# Allegro board CAD1.brd
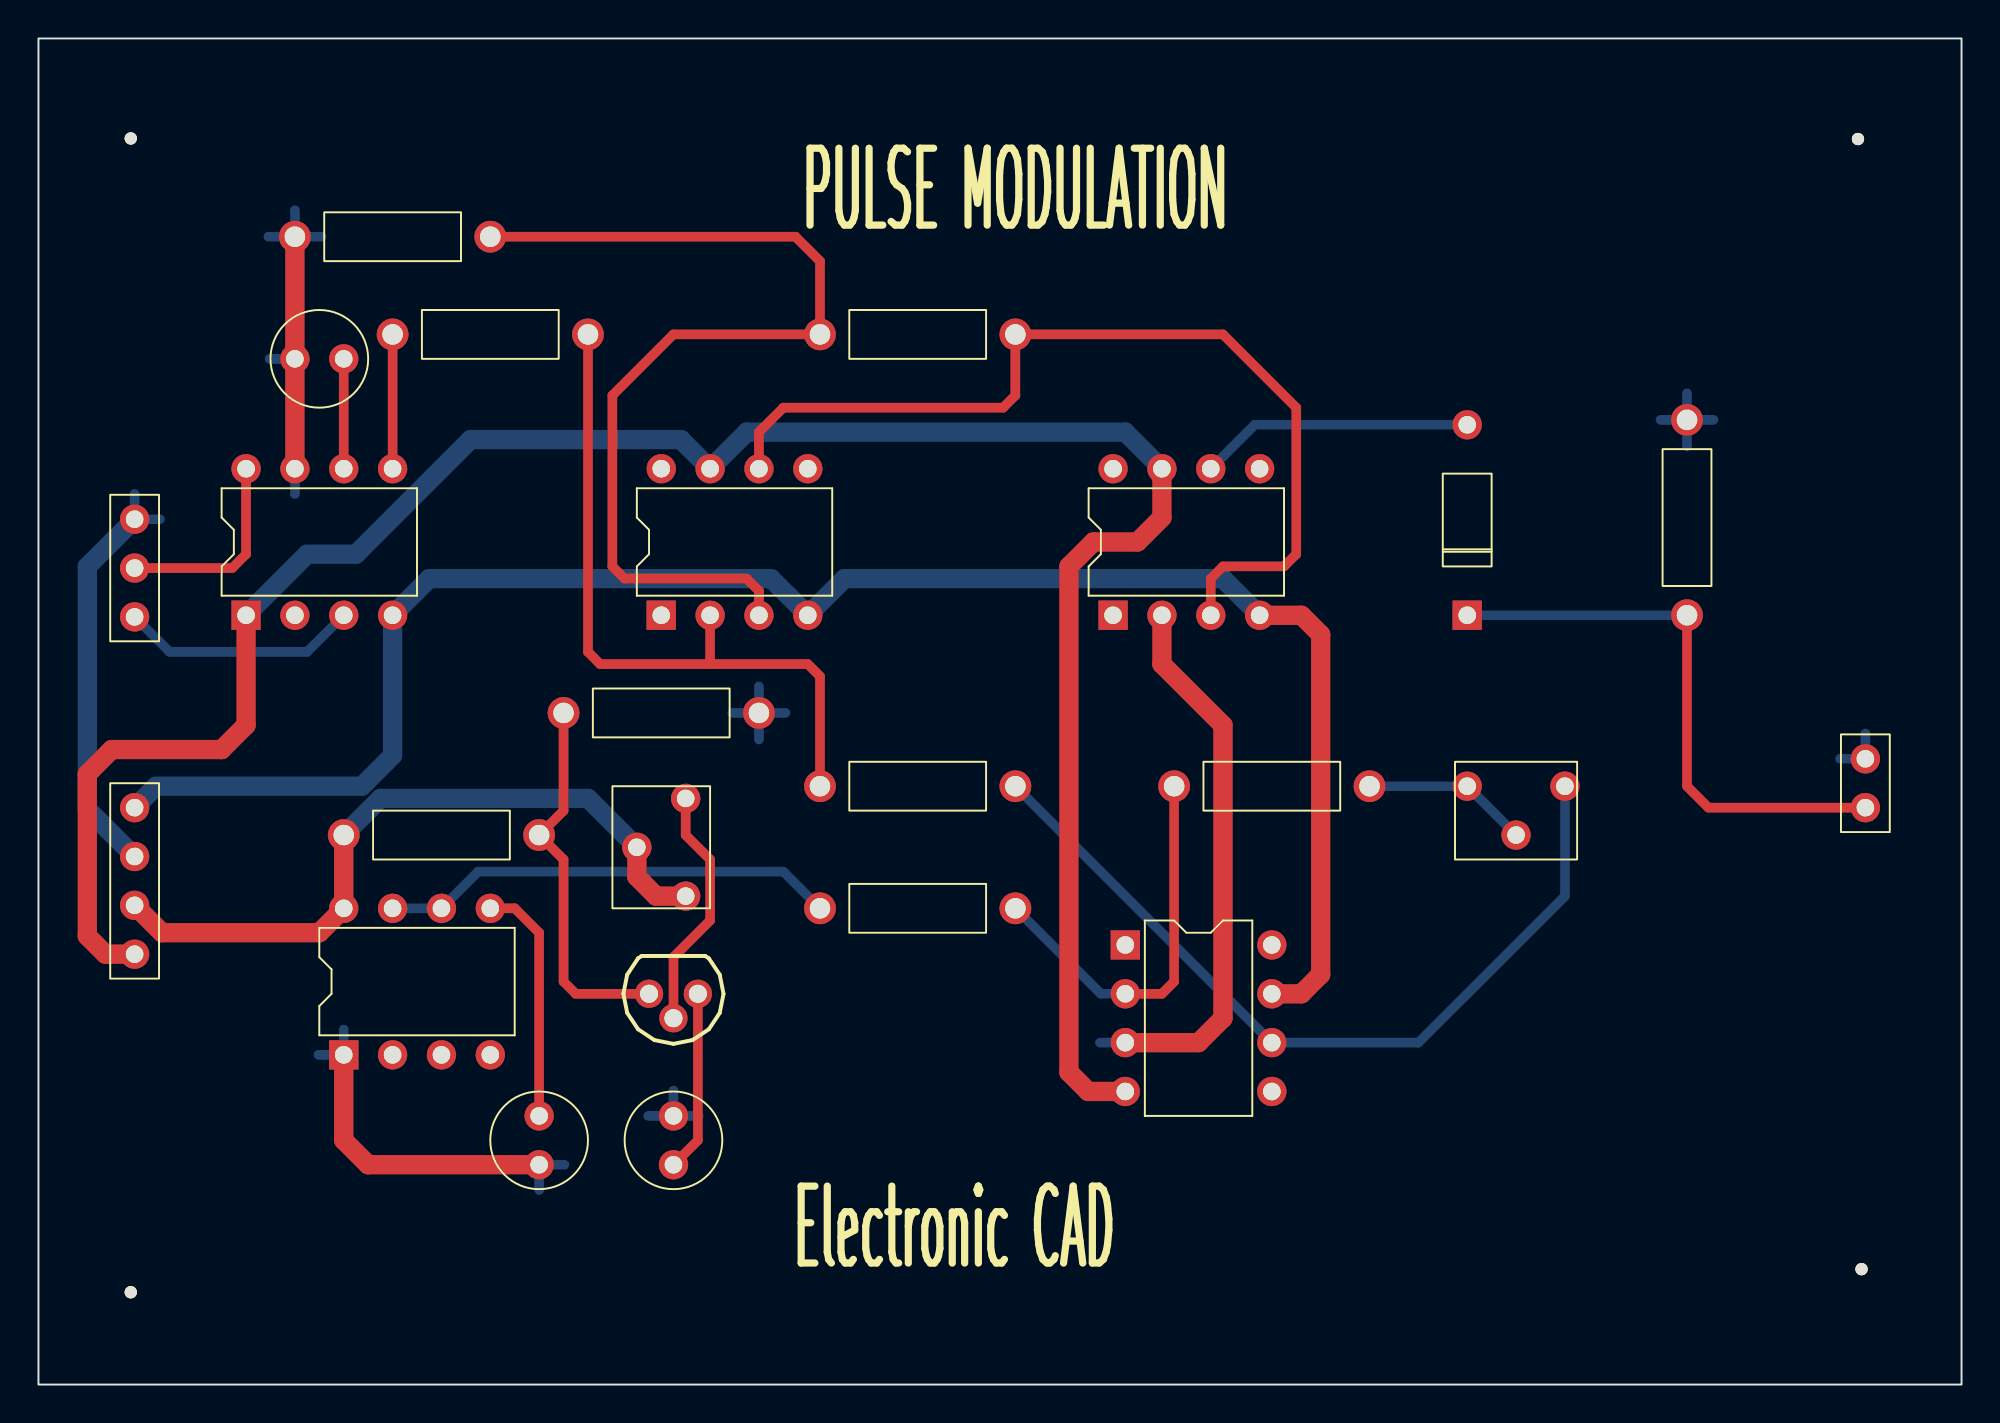
[diagram p0: board, top side]
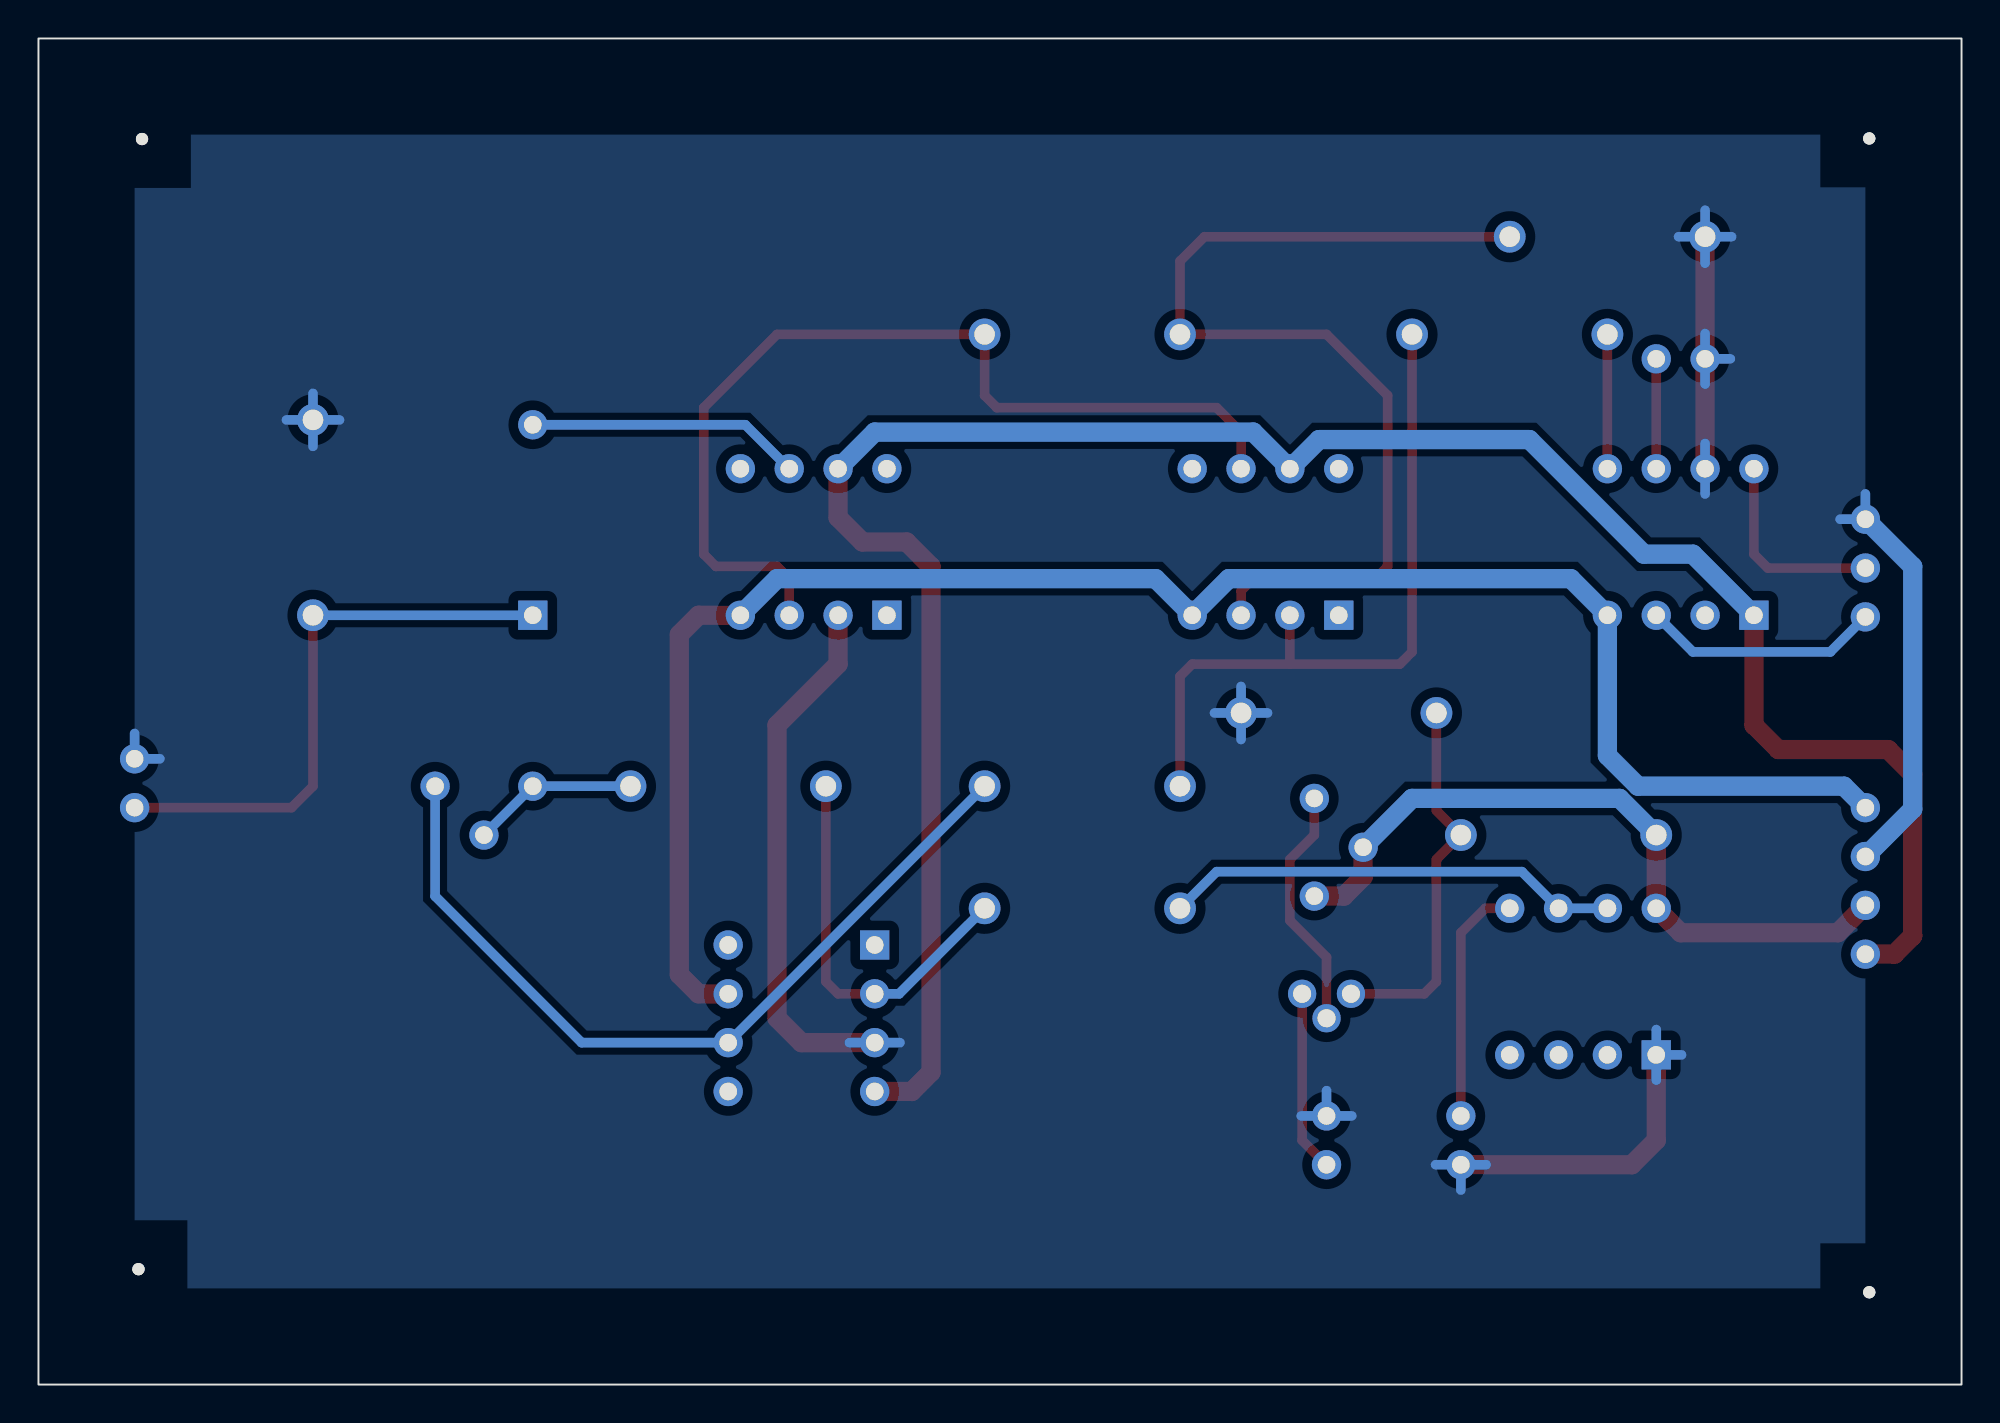
[diagram p1: board, bottom side, seen from below]

Outline 100 x 70 mm; copper layers: TOP, BOTTOM. Coordinates in mm from the lower left corner of the outline.
Outline path: rectangle 0,0 100,70

## Design rules (mm)
constraint set DEFAULT: min track width 0.5

## Placement (name value [footprint] x y rotation side)
C1  0.01uF  [CAP196]  33.02 11.43 0 top
C2  0.01uF  [CAP196]  26.04 13.97 180 top
C3  0.01uF  [CAP196]  13.34 53.34 270 top
D2  DIODE  [DO41]  74.3 40.01 0 top
J1  CON4  [JUMPER4]  5 30 270 top
J2  CON3  [JUMPER3]  5 45 270 top
J3  CON2  [JUMPER2]  95 30 90 top
NOREF  -  []  0 70 0 top
NOREF#2  -  [unnamed#2]  94.8 6 0 top
NOREF#3  -  [unnamed#2]  4.8 4.8 0 top
NOREF#4  -  [unnamed#2]  4.8 64.8 0 top
NOREF#5  -  [unnamed#2]  94.61 64.77 0 top
NOREF#6  -  []  100 0 90 top
Q1  2SA1020  [TO226AB]  34.29 20.32 180 top
R1  560  [RES400]  59.05 31.11 270 top
R2  39K  [RES400]  15.88 28.57 270 top
R3  6.2K  [RES400]  40.64 24.77 270 top
R4  100K  [RES400]  27.3 34.92 270 top
R5  10K  [RES400]  50.8 31.11 90 top
R6  10K  [RES400]  50.8 54.61 90 top
R7  10K  [RES400]  18.41 54.61 270 top
R8  10K  [RES400]  13.34 59.69 270 top
R9  10K  [RES400]  85.72 40.01 0 top
U1  NE555  [DIP8_3]  15.88 17.14 90 top
U2  LF356  [DIP8_3]  56.52 22.86 0 top
U3  LF398  [DIP8_3]  10.79 40.01 90 top
U4  LF356  [DIP8_3]  32.38 40.01 90 top
U5  LF356  [DIP8_3]  55.88 40.01 90 top
VR1  5K  [RESADJ]  33.66 30.48 0 top
VR2  20K  [RESADJ]  74.3 31.11 90 top

## Library data of the parts
C1-C3 = CAP NP: Tolerance: ***; User Part Number: ***
D2 = DIODE
J1 = CON4: User Part Number: ***
J2 = CON3: User Part Number: ***
J3 = CON2: User Part Number: ***
Q1 = 2SA1020
R1-R9 = R: Tolerance: ***; User Part Number: ***
U1 = NE555_0: Tolerance: ***; User Part Number: ***
U2 U4 U5 = LF356_7: Tolerance: ***; User Part Number: ***
U3 = LF357_2: Tolerance: ***; User Part Number: ***
VR1 VR2 = POT: Tolerance: ***; User Part Number: ***

## Footprints (pads in the part's own frame, mm; a bottom-side part is the same pattern mirrored in y, then rotated)
CAP196
  round 1.524 hole 0.914: 1(0,0) 2(0,2.54)
DIP8_3
  rect 1.524x1.524 hole 0.914: 1(0,0)
  round 1.524 hole 0.914: 2(0,-2.54) 3(0,-5.08) 4(0,-7.62) 5(7.62,-7.62) 6(7.62,-5.08) 7(7.62,-2.54) 8(7.62,0)
DO41
  rect 1.524x1.524 hole 0.914: 1(0,0)
  round 1.524 hole 0.914: 2(0,9.906)
JUMPER2
  round 1.524 hole 0.914: 1(0,0) 2(2.54,0)
JUMPER3
  round 1.524 hole 0.914: 1(0,0) 2(2.54,0) 3(5.08,0)
JUMPER4
  round 1.524 hole 0.914: 1(0,0) 2(2.54,0) 3(5.08,0) 4(7.62,0)
RES400
  round 1.651 hole 1.067: 1(0,0) 2(0,10.16)
RESADJ
  round 1.524 hole 0.914: 1(0,0) 2(-2.54,-2.54) 3(0,-5.08)
TO226AB
  round 1.473 hole 0.94: 1(0,0) 2(1.27,1.27) 3(2.54,0)
unnamed#2
  round 0.635 hole 3.175 unplated: (0,0)

## Nets
+5V: J1.3 R2.1 U1.8(VCC) VR1.2(WIPER) VR1.3
+15V: J1.4 U2.4 U3.1 U4.7(V-) U5.7(V-)
-15V: J1.1 U2.7(V-) U3.4(V-) U4.4 U5.4
GND: C1.2 C2.2 C3.1 J1.2 J2.1 J3.2 R4.2 R8.1 R9.2 U1.1 U2.3 U3.7 U5.2
CLOCK: U1.2
SIG_1: R5.1 U2.6 VR2.3
N00908: Q1.3 R2.2 R4.1
N00948: R3.1 U1.6 U1.7
N01029: Q1.2 VR1.1
N01231: C1.1 Q1.1(E)
N01335: R1.1 R3.2 U2.2
N01504: R1.2 VR2.1 VR2.2(WIPER)
N02320: C3.2 U3.6
N02366: J2.2 U3.8
N02370: J2.3 U3.3
N02402: R7.1 U3.5
N02445: R5.2 R7.2 U4.2
N02725: R6.2 R8.2 U4.3
N03532: R6.1 U4.6 U5.3
N04025: D2.1(K) J3.1 R9.1
N06024: C2.1 U1.5
N06727: D2.2 U5.6

Pads without a net: U1 3 4; U2 1 5 8; U3 2; U4 1 5 8; U5 1 5 8

## Routing (per net, layer and track width the routed paths; a pad name or vN(x,y) marks a point on that pad's centre or on a via; arc(x,y) is an arc through that point)
+5V: length 37.4
  TOP w1: R2.1 U1.8 14.61,23.5 6.42,23.5 J1.3 ; VR1.3 32.12,25.4 31.11,26.4 VR1.2
  BOTTOM w1: R2.1 17.78,30.48 28.57,30.48 VR1.2
+15V: length 118
  TOP w1: U5.7 58.42,45.09 57.15,43.81 54.86,43.81 53.59,42.55 53.59,16.24 54.59,15.24 U2.4 ; U3.1 10.79,34.29 9.53,33.02 3.81,33.02 2.54,31.75 2.54,23.32 3.48,22.38 J1.4
  BOTTOM w1: U5.7 56.52,49.53 36.83,49.53 U4.7 33.41,49.14 22.47,49.14 16.51,43.18 13.97,43.18 U3.1
-15V: length 94.3
  TOP w1: U5.4 65.67,40.01 66.67,39 66.67,21.32 65.67,20.32 U2.7
  BOTTOM w1: J1.1 6.12,31.11 16.82,31.11 18.41,32.71 U3.4 20.32,41.91 38.1,41.91 U4.4 41.91,41.91 61.59,41.91 U5.4
GND: length 117.5
  TOP w1: U2.3 60.33,17.78 61.59,19.05 61.59,34.29 58.42,37.47 U5.2 ; U3.7 C3.1 R8.1 ; C2.2 17.15,11.43 15.88,12.7 U1.1
  BOTTOM w0.5: 84.35,50.16 85.72,50.16 ; 85.72,50.16 87.1,50.16 ; 85.72,50.16 85.72,48.79 ; 85.72,50.16 85.72,51.54 ; 12.02,53.34 C3.1 ; C3.1 13.34,52.02 ; C3.1 13.34,54.66 ; 36.09,34.92 R4.2 ; R4.2 37.47,36.3 ; R4.2 37.47,33.55 ; R4.2 38.84,34.92 ; 11.96,59.69 R8.1 ; R8.1 13.34,58.31 ; R8.1 14.71,59.69 ; R8.1 13.34,61.07 ; U1.1 15.88,18.46 ; U1.1 15.88,15.83 ; U1.1 14.56,17.14 ; 26.04,10.12 C2.2 ; C2.2 24.72,11.43 ; C2.2 27.35,11.43 ; 57.83,17.78 U2.3 55.2,17.78 ; 93.69,32.54 J3.2 95,33.85 ; 5,46.31 J2.1 6.32,45 ; C1.2 34.34,13.97 ; C1.2 33.02,15.29 ; C1.2 31.7,13.97 ; 13.34,48.94 U3.7 13.34,46.31
  BOTTOM w1: J1.2 2.54,29.92 2.54,42.54 J2.1
SIG_1: length 43
  BOTTOM w0.5: R5.1 U2.6 71.75,17.78 79.38,25.4 VR2.3
N00908: length 19.7
  TOP w0.5: R4.1 27.3,29.84 R2.2 27.3,27.3 27.3,20.95 27.94,20.32 Q1.3
N00948: length 23.8
  BOTTOM w0.5: U1.7 U1.6 22.86,26.67 38.73,26.67 R3.1
N01029: length 12.7
  TOP w0.5: VR1.1 33.66,28.58 34.92,27.31 34.92,24.13 33.02,22.23 Q1.2
N01231: length 9.4
  TOP w0.5: Q1.1 34.29,12.7 C1.1
N01335: length 20.5
  TOP w0.5: R1.1 59.05,20.96 58.42,20.32 U2.2
  BOTTOM w0.5: U2.2 55.24,20.32 R3.2
N01504: length 8.7
  BOTTOM w0.5: R1.2 VR2.1 VR2.2
N02320: length 5.7
  TOP w0.5: C3.2 U3.6
N02366: length 10.5
  TOP w0.5: U3.8 10.79,43.18 10.07,42.46 J2.2
N02370: length 12.4
  BOTTOM w0.5: J2.3 6.82,38.1 13.97,38.1 U3.3
N02402: length 7
  TOP w0.5: R7.1 U3.5
N02445: length 37.4
  TOP w0.5: R7.2 28.57,38.1 29.21,37.47 34.92,37.47 ; 34.92,37.47 40.01,37.47 40.64,36.83 R5.2 ; 34.92,37.47 U4.2
N02725: length 51.9
  TOP w0.5: U4.3 37.47,41.27 36.83,41.91 30.48,41.91 29.84,42.55 29.84,51.44 33.02,54.61 R6.2 40.64,58.42 39.37,59.69 R8.2
N03532: length 49.9
  TOP w0.5: U5.3 60.96,41.91 61.59,42.55 64.77,42.55 65.41,43.18 65.41,50.8 61.59,54.61 R6.1 50.8,51.44 50.16,50.8 38.73,50.8 37.47,49.53 U4.6
N04025: length 30.1
  TOP w0.5: R9.1 85.72,31.11 86.84,30 J3.1
  BOTTOM w0.5: D2.1 R9.1
N06024: length 12.6
  TOP w0.5: C2.1 26.04,23.5 24.77,24.77 U1.5
N06727: length 14.3
  BOTTOM w0.5: U5.6 63.25,49.91 D2.2

## Copper pours and planes (outline as drawn; the poured copper is in the pictures)
GND on BOTTOM: 5,5 5,65 95,65 95,5 ; 2 cut-outs

## Text on the board
Ref Des/Silkscreen Top: Electronic CAD | PULSE MODULATION
DIMENSION: FIGURE | FINISHED_SIZE | 0.914 | 0.94 | 1.067 | 3.175 | DRILL CHART: TOP to BOTTOM | ALL UNITS ARE IN MILLIMETERS | PLATED | NON-PLATED | QTY | 63 | 3 | 18 | 4
